# Altium PCB A3010_4MB.PcbDoc
Units mm, origin at the board's own origin, x right, y up, seen from the top; angles counter-clockwise.
Board outline 42.55 x 53.97 mm, 4 copper layers (F.Cu, In1.Cu, In2.Cu, B.Cu); 11 components, 73 nets, 178 pads, 69 vias.
Unrouted connection lines stored in the file: 1.
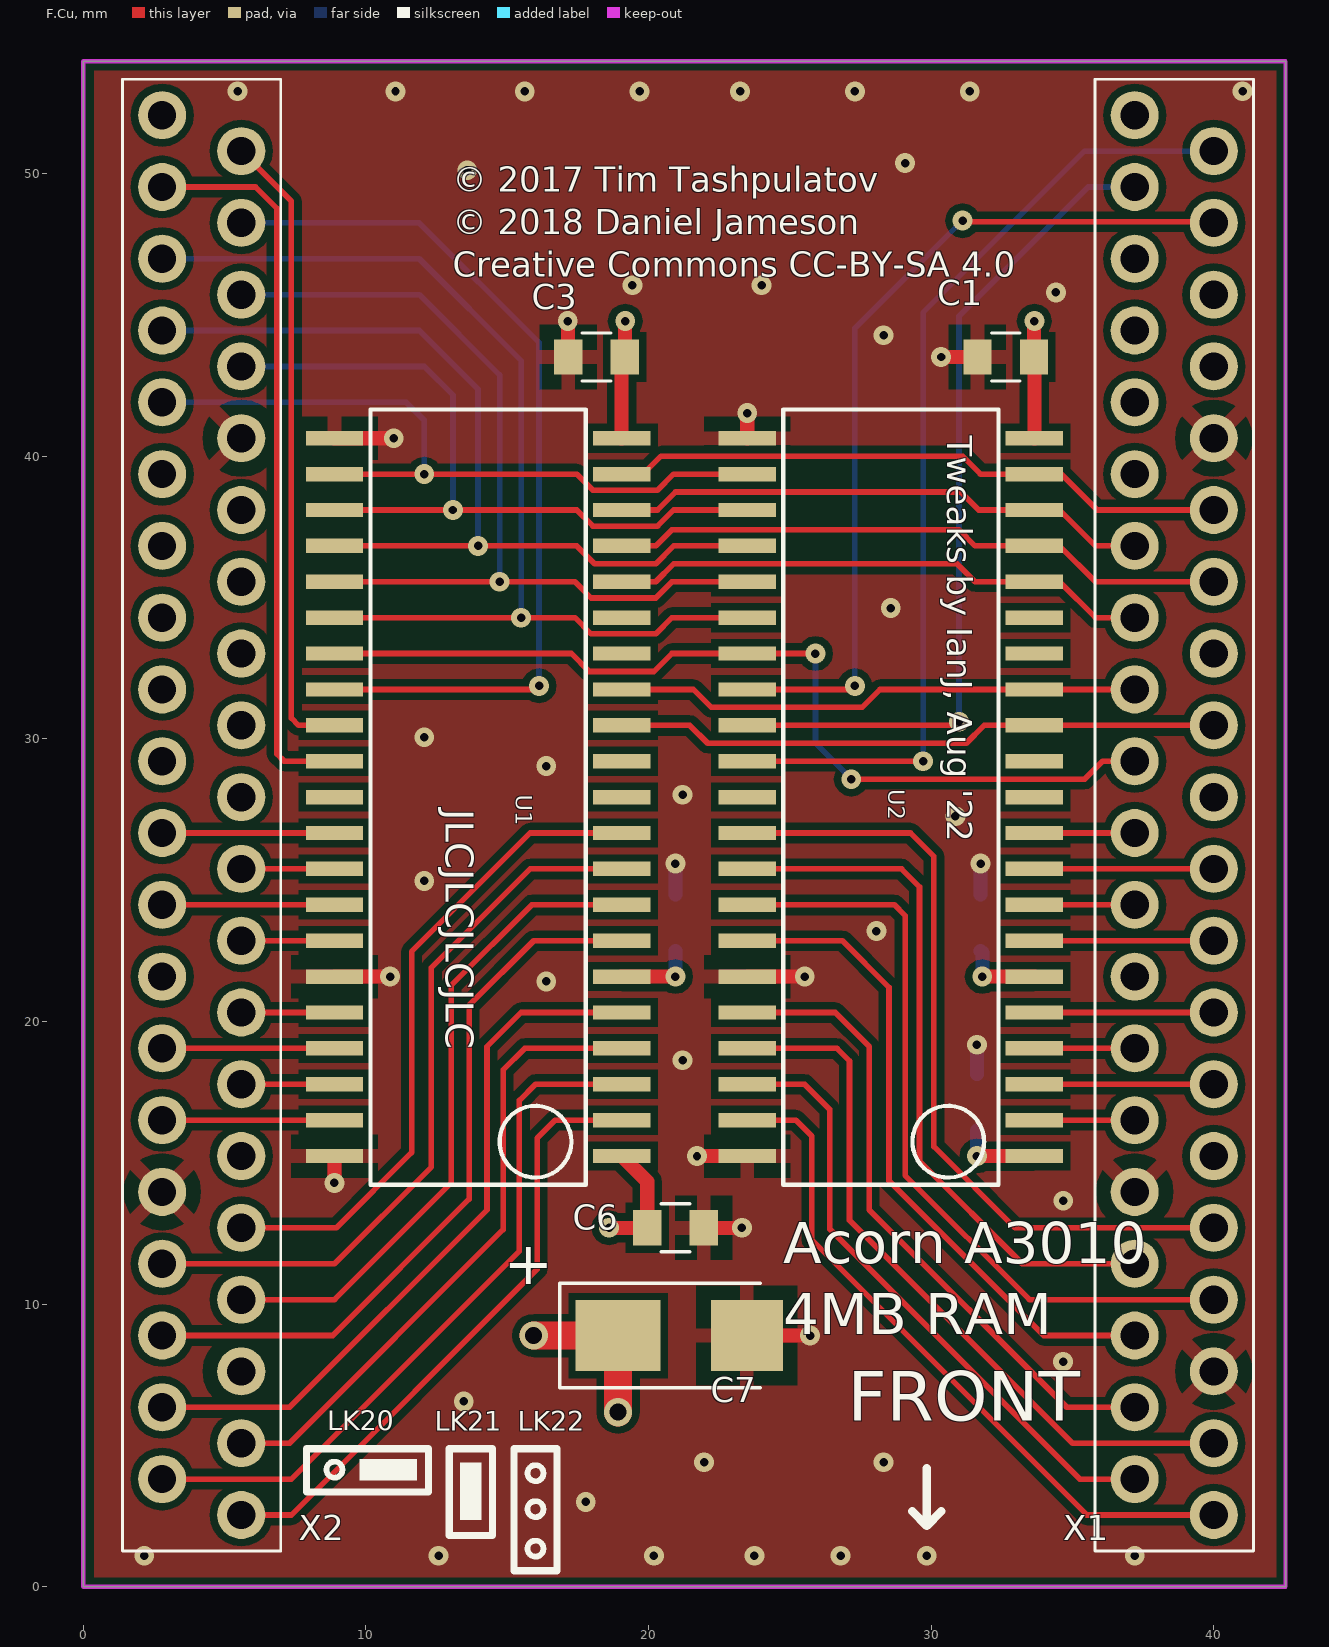
[diagram p0: F.Cu view]
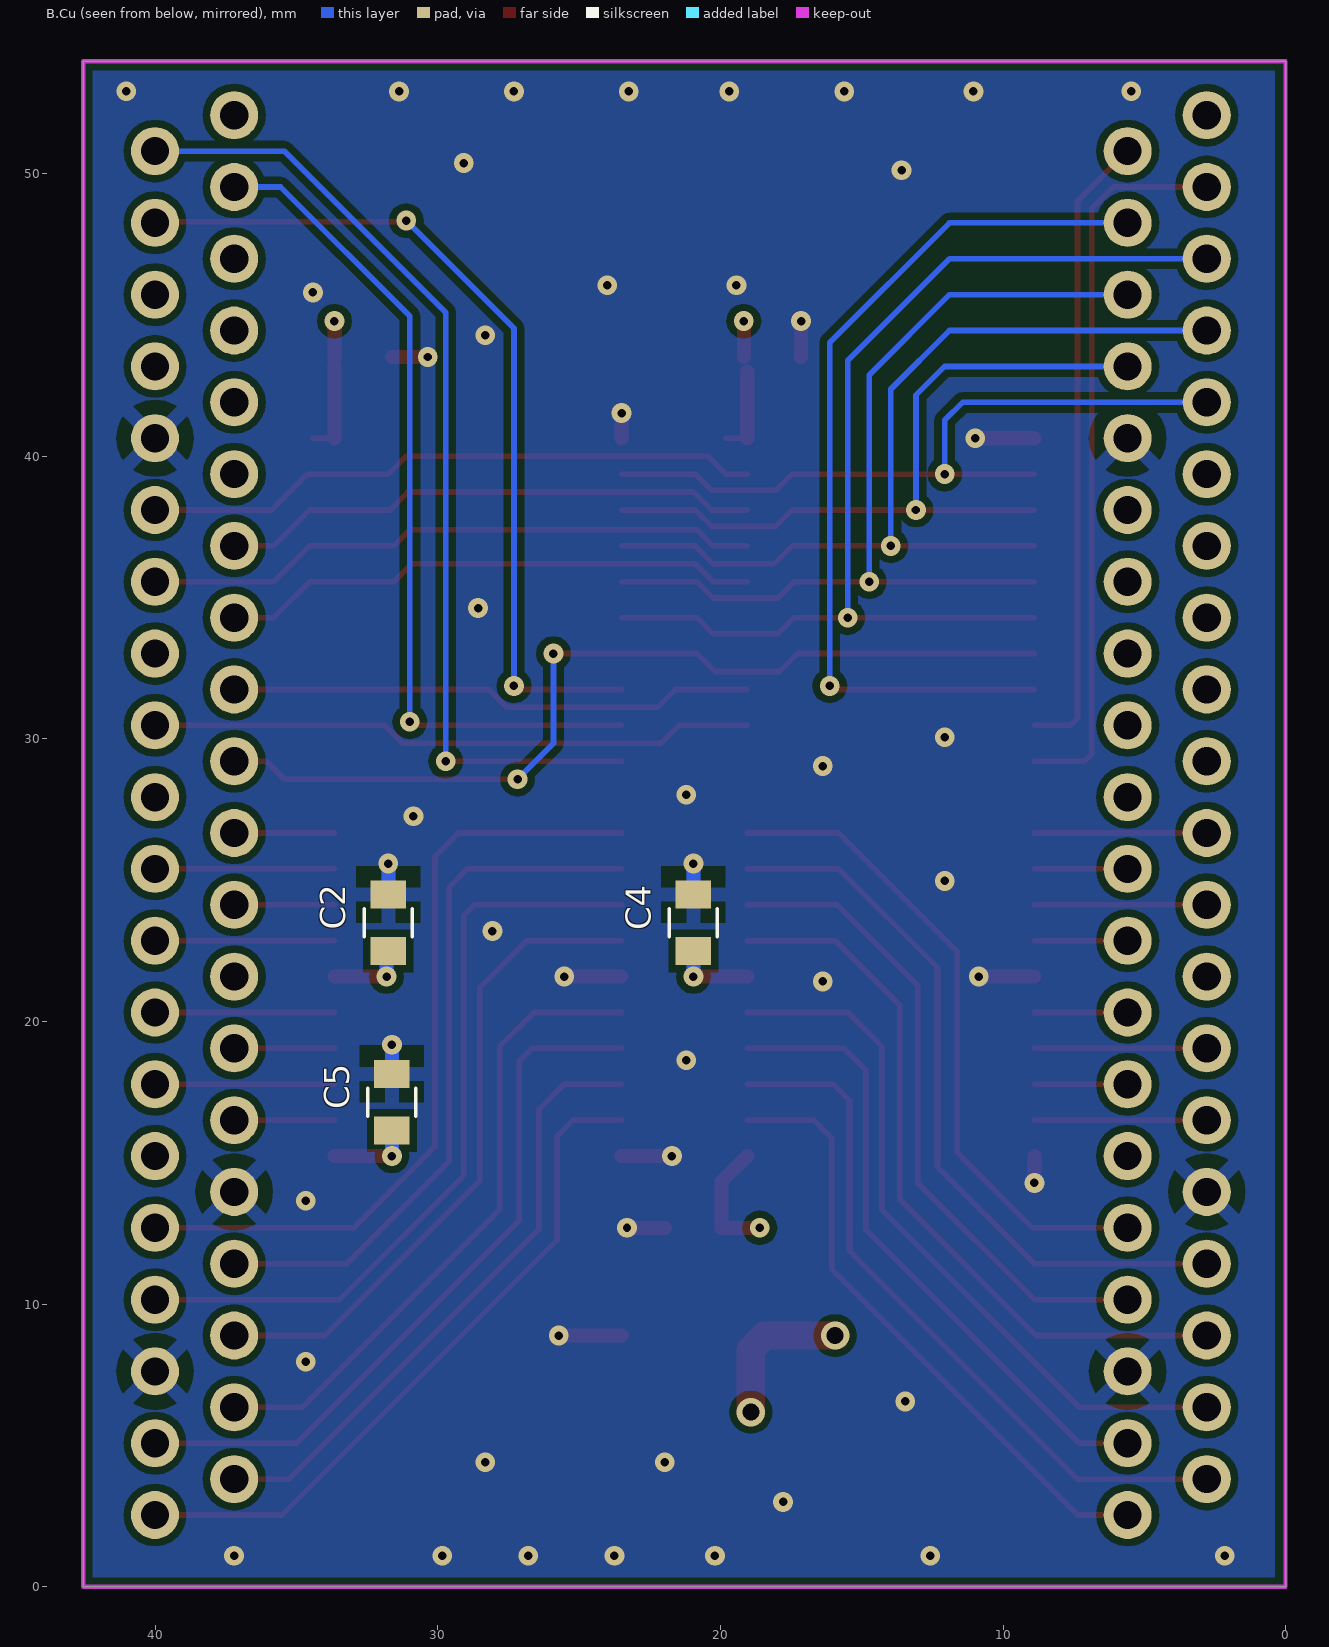
[diagram p1: B.Cu view, seen from below]
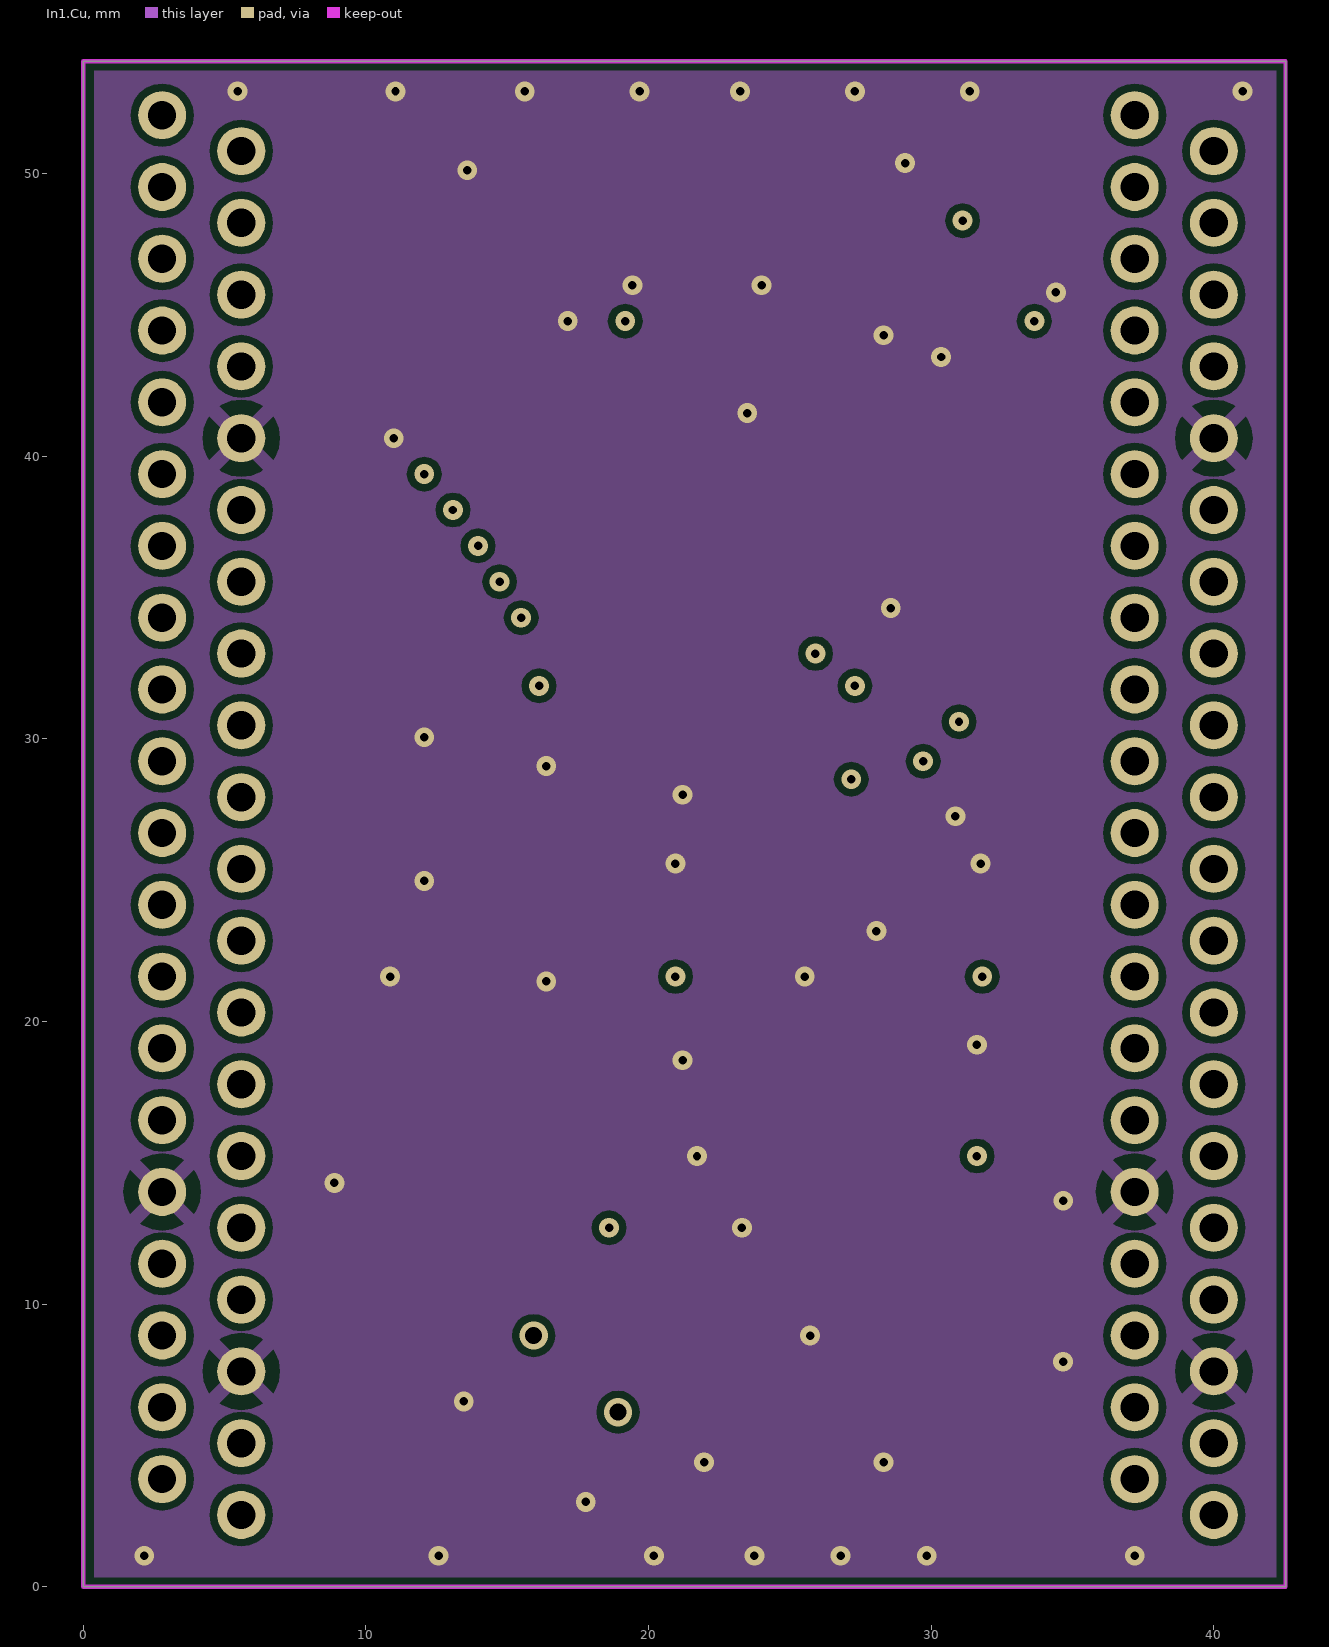
[diagram p2: In1.Cu]
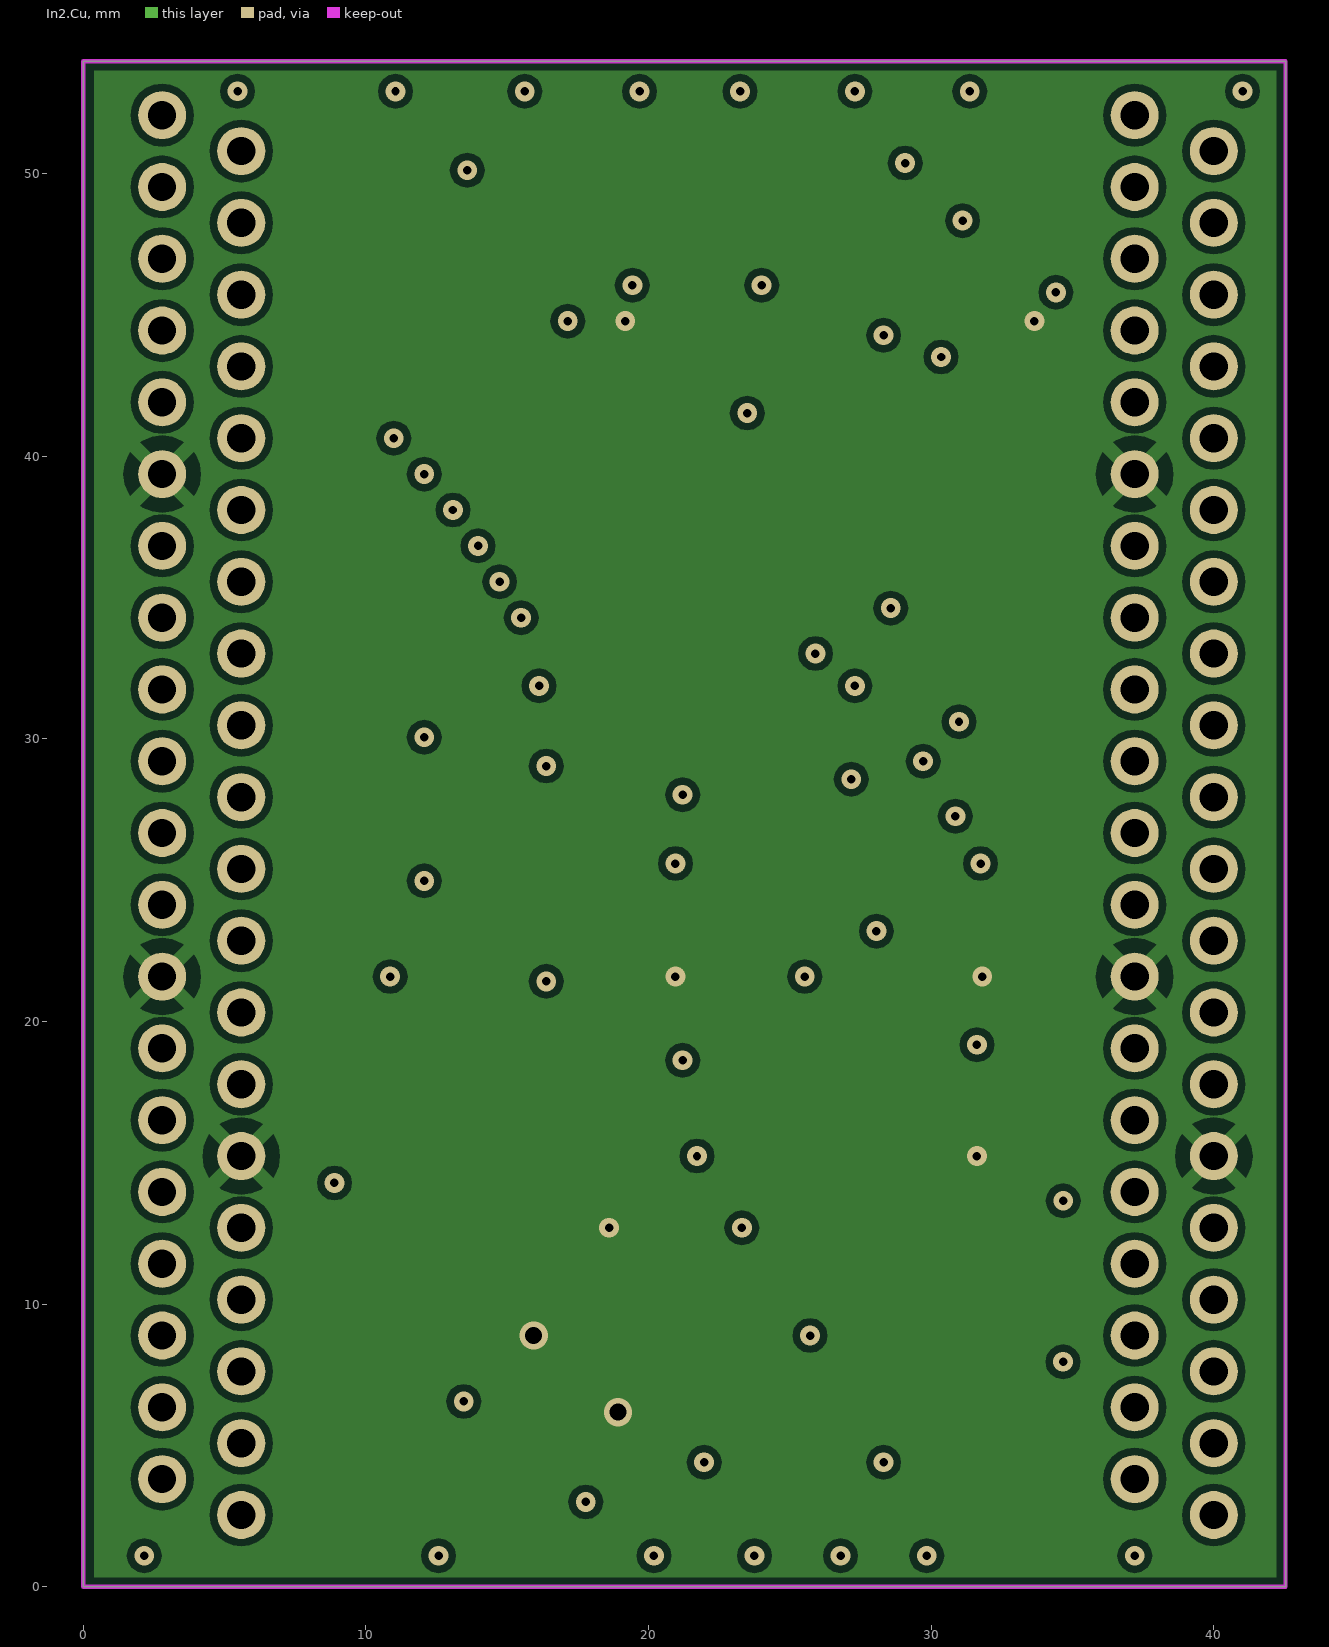
[diagram p3: In2.Cu]

## Layer stack, top to bottom
F.Mask: solder mask 0.0102, Solder Resist, Dk 3.5
F.Cu: signal copper 0.0356
Dielectric 1: dielectric 0.32, FR-4, Dk 4.8
In1.Cu: signal copper 0.0356
Dielectric2: dielectric 0.32, FR-4, Dk 4.8
In2.Cu: signal copper 0.0356
Dielectric3: dielectric 0.32, FR-4, Dk 4.8
B.Cu: signal copper 0.0356
B.Mask: solder mask 0.0102, Solder Resist, Dk 3.5

## Board outline
42.545,53.975 42.545,0 0,0 0,53.975

## Design rules (kind name [scope] priority, off if disabled: settings)
Clearance "Clearence 0.254_Polygon" [InNamedPolygon('In1.Cu-VSS') OR InNamedPolygon('In2.Cu-VCC') OR InNamedPolygon('In2.Cu-VCC-1') OR InNamedPolygon('F.Cu-VSS') OR InNamedPolygon('B.Cu-VSS')] p1: gap=0.254 ignorepadtopadclearanceinfootprint=FALSE
HoleSize "Hole Size (Default)" [All] p1: absolutevalues=TRUE maxlimit=10 minlimit=0.3 maxpercent=80.000 minpercent=20.000
MinimumSolderMaskSliver [All] p1: minsoldermaskwidth=0
PolygonConnect Polygon_B.Cu-VSS_ConnectDirect [IsNamedPolygon('B.Cu-VSS') vs IsVia] p1: connectstyle=Direct reliefconductorwidth=0.254 reliefentries=4 polygonreliefangle="90 Angle" airgapwidth=0.254
PolygonConnect Polygon_B.Cu-VSS_ConnectRelief45 [IsNamedPolygon('B.Cu-VSS') vs (IsThruPin or IsSMTPin) and (PadShape_AllLayers = 'Round')] p2: connectstyle=Relief reliefconductorwidth=0.508 reliefentries=4 polygonreliefangle="45 Angle" airgapwidth=0.508
PolygonConnect Polygon_B.Cu-VSS_ConnectRelief90 [IsNamedPolygon('B.Cu-VSS') vs (IsThruPin or IsSMTPin) and (PadShape_AllLayers <> 'Round')] p3: connectstyle=Relief reliefconductorwidth=0.508 reliefentries=4 polygonreliefangle="90 Angle" airgapwidth=0.508
PolygonConnect Polygon_F.Cu-VSS_ConnectDirect [IsNamedPolygon('F.Cu-VSS') vs IsVia] p4: connectstyle=Direct reliefconductorwidth=0.254 reliefentries=4 polygonreliefangle="90 Angle" airgapwidth=0.254
PolygonConnect Polygon_F.Cu-VSS_ConnectRelief45 [IsNamedPolygon('F.Cu-VSS') vs (IsThruPin or IsSMTPin) and (PadShape_AllLayers = 'Round')] p5: connectstyle=Relief reliefconductorwidth=0.508 reliefentries=4 polygonreliefangle="45 Angle" airgapwidth=0.508
PolygonConnect Polygon_F.Cu-VSS_ConnectRelief90 [IsNamedPolygon('F.Cu-VSS') vs (IsThruPin or IsSMTPin) and (PadShape_AllLayers <> 'Round')] p6: connectstyle=Relief reliefconductorwidth=0.508 reliefentries=4 polygonreliefangle="90 Angle" airgapwidth=0.508
PolygonConnect Polygon_In2.Cu-VCC-1_ConnectDirect [IsNamedPolygon('In2.Cu-VCC-1') vs IsVia] p7: connectstyle=Direct reliefconductorwidth=0.254 reliefentries=4 polygonreliefangle="90 Angle" airgapwidth=0.254
PolygonConnect Polygon_In2.Cu-VCC-1_ConnectRelief45 [IsNamedPolygon('In2.Cu-VCC-1') vs (IsThruPin or IsSMTPin) and (PadShape_AllLayers = 'Round')] p8: connectstyle=Relief reliefconductorwidth=0.508 reliefentries=4 polygonreliefangle="45 Angle" airgapwidth=0.508
PolygonConnect Polygon_In2.Cu-VCC-1_ConnectRelief90 [IsNamedPolygon('In2.Cu-VCC-1') vs (IsThruPin or IsSMTPin) and (PadShape_AllLayers <> 'Round')] p9: connectstyle=Relief reliefconductorwidth=0.508 reliefentries=4 polygonreliefangle="90 Angle" airgapwidth=0.508
PolygonConnect Polygon_In2.Cu-VCC_ConnectDirect [IsNamedPolygon('In2.Cu-VCC') vs IsVia] p10: connectstyle=Direct reliefconductorwidth=0.254 reliefentries=4 polygonreliefangle="90 Angle" airgapwidth=0.254
PolygonConnect Polygon_In2.Cu-VCC_ConnectRelief45 [IsNamedPolygon('In2.Cu-VCC') vs (IsThruPin or IsSMTPin) and (PadShape_AllLayers = 'Round')] p11: connectstyle=Relief reliefconductorwidth=0.508 reliefentries=4 polygonreliefangle="45 Angle" airgapwidth=0.508
PolygonConnect Polygon_In2.Cu-VCC_ConnectRelief90 [IsNamedPolygon('In2.Cu-VCC') vs (IsThruPin or IsSMTPin) and (PadShape_AllLayers <> 'Round')] p12: connectstyle=Relief reliefconductorwidth=0.508 reliefentries=4 polygonreliefangle="90 Angle" airgapwidth=0.508
PolygonConnect Polygon_In1.Cu-VSS_ConnectDirect [IsNamedPolygon('In1.Cu-VSS') vs IsVia] p13: connectstyle=Direct reliefconductorwidth=0.254 reliefentries=4 polygonreliefangle="90 Angle" airgapwidth=0.254
PolygonConnect Polygon_In1.Cu-VSS_ConnectRelief45 [IsNamedPolygon('In1.Cu-VSS') vs (IsThruPin or IsSMTPin) and (PadShape_AllLayers = 'Round')] p14: connectstyle=Relief reliefconductorwidth=0.508 reliefentries=4 polygonreliefangle="45 Angle" airgapwidth=0.508
PolygonConnect Polygon_In1.Cu-VSS_ConnectRelief90 [IsNamedPolygon('In1.Cu-VSS') vs (IsThruPin or IsSMTPin) and (PadShape_AllLayers <> 'Round')] p15: connectstyle=Relief reliefconductorwidth=0.508 reliefentries=4 polygonreliefangle="90 Angle" airgapwidth=0.508
RoutingVias [All] p1: holewidth=0.711 width=1.27 viastyle="Through Hole" minholewidth=0.711 minwidth=1.27 maxholewidth=0.711 maxwidth=1.27
SilkToSilkClearance [All] p1: silktosilkclearance=0
SilkToSolderMaskClearance [IsPad] p1: minsilkscreentomaskgap=0 clearancetoexposedcopper=TRUE
SolderMaskExpansion [All] p1: expansion=0.102 istentingtop=FALSE
Width [All] p1: maxlimit=10 minlimit=0.2 preferedwidth=0.25 minimp=50.000000 maximp=50.000000 favimp=50.000000
26 further rules are at their usual default settings.

## Classes and differential pairs
net class Default: A0 A1 A2 A3 A4 A5 A6 A7 A8 A9 C\A\S\0\ C\A\S\1\ C\A\S\2\ C\A\S\3\ D0 D1 D2 D3 D4 D5 D6 D7 D8 D9 D10 D11 D12 D13 D14 D15 D16 D17 D18 D19 D20 D21 D22 D23 D24 D25 D26 D27 D28 D29 D30 D31 Net-(U1-Pad15) Net-(U1-Pad16) Net-(U2-Pad15) Net-(U2-Pad16) Net-(X1-Pad21) Net-(X1-Pad25) Net-(X1-Pad32) Net-(X1-Pad33) Net-(X1-Pad34) Net-(X1-Pad35) Net-(X1-Pad36) Net-(X1-Pad40) Net-(X2-Pad21) Net-(X2-Pad22) Net-(X2-Pad23) Net-(X2-Pad24) Net-(X2-Pad25) Net-(X2-Pad26) Net-(X2-Pad27) Net-(X2-Pad28) Net-(X2-Pad29) Net-(X2-Pad40) O\E\ R\A\S\ VCC VSS W\E\

## Components (designator, comment, footprint, x,y, rotation, side; value= is the part's Value field where it differs from the comment)
C1 "2,2u" C_0805#1 32.639,43.51 r180 top
C2 "2,2u" C_0805#2 31.75,23.491 r270 bottom
C3 "2,2u" C_0805#1 18.161,43.51 r180 top
C4 "2,2u" C_0805#2 20.955,23.491 r270 bottom
C5 "2,2u" C_0805#2 31.623,17.141 r270 bottom
C6 "2,2u" C_0805#1 20.955,12.696 r0 top
C7 "47u 16V" CP_Tantalum_Case-C_EIA-6032-28_Reflow 20.955,8.886 r0 top
U1 "IS41C16105C" SOJ-42 13.97,27.936 r90 top locked
U2 "IS41C16105C" SOJ-42 28.575,27.936 r90 top locked
X1 "ZIP40" ZIP40-P-475-1.27 38.605,26.666 r180 top locked
X2 "ZIP40" ZIP40-P-475-1.27 4.191,26.666 r180 top locked

## Footprints (in the part's own frame and the unit in brackets; to place one, negate y for a bottom-side part, rotate by r counter-clockwise, add the part's x,y. Pads: shape width x height; smd on the part's side, far side on the other; paste and mask are expansions set on the pad)
C_0805#1 [mm]
  rect 1x1.25 smd mask+0.2: 1(-1,0) 2(1,0)
  silkscreen extent -0.5,-0.85 0.5,0.85
C_0805#2 [mm]
  rect 1x1.25 smd mask+0.2: 1(1,0) 2(-1,0)
  silkscreen extent -0.5,-0.85 0.5,0.85
CP_Tantalum_Case-C_EIA-6032-28_Reflow [mm]
  rect 3x2.5 smd mask+0.2: 1(-2.03,0)
  rect 2.55x2.5 smd mask+0.2: 2(2.525,0)
  silkscreen extent -4.1,-1.85 3,1.85
SOJ-42 [mil]
  rect 20x80 smd mask+7.87: 1(-500,-200) 2(-450,-200) 3(-400,-200) 4(-350,-200) 5(-300,-200) 6(-250,-200) 7(-200,-200) 8(-150,-200) 9(-100,-200) 10(-50,-200) 11(0,-200) 12(50,-200) 13(100,-200) 14(150,-200) 15(200,-200) 16(250,-200) 17(300,-200) 18(350,-200) 19(400,-200) 20(450,-200) 21(500,-200) 22(500,200) 23(450,200) 24(400,200) 25(350,200) 26(300,200) 27(250,200) 28(200,200) 29(150,200) 30(100,200) 31(50,200) 32(0,200) 33(-50,200) 34(-100,200) 35(-150,200) 36(-200,200) 37(-250,200) 38(-300,200) 39(-350,200) 40(-400,200) 41(-450,200) 42(-500,200)
  silkscreen extent -540,-150 540,150
ZIP40-P-475-1.27 [mm]
  round 1.7 hole 1 paste-1.7 mask+0.2: 1(-1.4,24.13) 2(1.4,22.86) 3(-1.4,21.59) 4(1.4,20.32) 5(-1.4,19.05) 6(1.4,17.78) 7(-1.4,16.51) 8(1.4,15.24) 9(-1.4,13.97) 10(1.4,12.7) 11(-1.4,11.43) 12(1.4,10.16) 13(-1.4,8.89) 14(1.4,7.62) 15(-1.4,6.35) 16(1.4,5.08) 17(-1.4,3.81) 18(1.4,2.54) 19(-1.4,1.27) 20(1.4,0) 21(-1.4,-1.27) 22(1.4,-2.54) 23(-1.4,-3.81) 24(1.4,-5.08) 25(-1.4,-6.35) 26(1.4,-7.62) 27(-1.4,-8.89) 28(1.4,-10.16) 29(-1.4,-11.43) 30(1.4,-12.7) 31(-1.4,-13.97) 32(1.4,-15.24) 33(-1.4,-16.51) 34(1.4,-17.78) 35(-1.4,-19.05) 36(1.4,-20.32) 37(-1.4,-21.59) 38(1.4,-22.86) 39(-1.4,-24.13) 40(1.4,-25.4)
  silkscreen extent -2.8,-26.67 2.8,25.4

## Part data
C1 C2 C3 C4 C5 C6: library part C
C7: library part CP1
U1 U2: library part DRAM_1MX16_SOJ

## Via types
v1: diameter 0.7, hole 0.3, F.Cu to B.Cu, tented both sides, 67 vias
v2: diameter 1, hole 0.6, F.Cu to B.Cu, tented both sides, 2 vias

## Nets (pads, with @x,y where several pads share a name; then routed paths per layer and width w, separated by ;. In a path a pad name is that pad's centre, name@x,y a point inside that pad or via, vN(x,y) a via of type N, cw(c..) or ccw(c..) an arc to the next point about the centre after c; other vN are vias at no path point)
A0: U1.17 U2.17 X1.26 | length 19.2
  F.Cu w0.2: U1.17 20.256,35.556 20.892,36.191 30.924,36.191 31.559,35.556 U2.17 34.544,35.556 35.814,34.286 X1.26
A1: U1.18 U2.18 X1.27 | length 22
  F.Cu w0.2: U1.18 20.256,36.826 20.828,37.398 30.988,37.398 31.559,36.826 U2.18 34.544,36.826 35.814,35.556 X1.27
A2: U1.19 U2.19 X1.28 | length 19.2
  F.Cu w0.2: U1.19 20.32,38.096 20.955,38.731 31.051,38.731 31.686,38.096 U2.19 34.544,38.096 35.814,36.826 X1.28
A3: U1.20 U2.20 X1.29 | length 22
  F.Cu w0.2: U1.20 19.812,39.366 20.447,40.001 31.115,40.001 31.75,39.366 U2.20 34.608,39.366 35.877,38.096 X1.29
A4: U1.23 U2.23 X2.32 | length 26.5
  F.Cu w0.2: U1.23 v1(12.065,39.366) 17.462,39.366 18.034,38.795 20.32,38.795 20.892,39.366 U2.23
  B.Cu w0.2: X2.32 11.43,41.906 12.065,41.271 v1(12.065,39.366)
A5: U1.24 U2.24 X2.33 | length 27.1
  F.Cu w0.2: U1.24 v1(13.081,38.096) 17.462,38.096 18.034,37.525 20.32,37.525 20.892,38.096 U2.24
  B.Cu w0.2: X2.33 12.065,43.176 13.081,42.16 v1(13.081,38.096)
A6: U1.25 U2.25 X2.34 | length 32.7
  F.Cu w0.2: U1.25 v1(13.97,36.826) 17.462,36.826 18.098,36.191 20.256,36.191 20.892,36.826 U2.25
  B.Cu w0.2: X2.34 11.891,44.446 13.97,42.367 v1(13.97,36.826)
A7: U1.26 U2.26 X2.35 | length 32.7
  F.Cu w0.2: U1.26 v1(14.732,35.556) 17.399,35.556 17.97,34.985 20.256,34.985 20.828,35.556 U2.26
  B.Cu w0.2: X2.35 11.891,45.716 14.732,42.875 v1(14.732,35.556)
A8: U1.27 U2.27 X2.36 | length 38.4
  F.Cu w0.2: U1.27 v1(15.494,34.286) 17.399,34.286 17.97,33.715 20.256,33.715 20.828,34.286 U2.27
  B.Cu w0.2: X2.36 11.891,46.986 15.494,43.383 v1(15.494,34.286)
A9: U1.28 U2.28 X1.22 | length 32.8
  F.Cu w0.2: U1.28 17.272,33.016 17.907,32.381 20.193,32.381 20.828,33.016 U2.28 v1(25.908,33.016) ; v1(27.178,28.571) 35.433,28.571 36.068,29.206 X1.22
  B.Cu w0.2: v1(25.908,33.016) 25.908,29.841 v1(27.178,28.571)
C\A\S\0\: U2.31 X1.39 | length 34.8
  F.Cu w0.2: U2.31 v1(29.718,29.206)
  B.Cu w0.2: v1(29.718,29.206) 29.718,45.081 35.433,50.796 X1.39
C\A\S\1\: U2.30 X1.38 | length 30
  F.Cu w0.2: U2.30 30.861,30.476 v1(30.988,30.603)
  B.Cu w0.2: v1(30.988,30.603) 30.988,44.954 35.56,49.526 X1.38
C\A\S\2\: U1.30 X2.39 | length 22.4
  F.Cu w0.2: X2.39 7.366,49.021 7.366,30.73 7.62,30.476 U1.30
C\A\S\3\: U1.31 X2.38 | length 25.8
  F.Cu w0.2: X2.38 6.096,49.526 6.858,48.764 6.858,29.46 7.112,29.206 U1.31
D0: U2.2 X1.12 | length 3.6
  F.Cu w0.2: U2.2 X1.12
D1: U2.3 X1.13 | length 6.3
  F.Cu w0.2: U2.3 X1.13
D2: U2.4 X1.14 | length 3.6
  F.Cu w0.2: U2.4 X1.14
D3: U2.5 X1.15 | length 6.3
  F.Cu w0.2: U2.5 X1.15
D4: U2.7 X1.17 | length 6.3
  F.Cu w0.2: U2.7 X1.17
D5: U2.8 X1.18 | length 3.6
  F.Cu w0.2: U2.8 X1.18
D6: U2.9 X1.19 | length 6.3
  F.Cu w0.2: U2.9 X1.19
D7: U2.10 X1.20 | length 3.6
  F.Cu w0.2: U2.10 X1.20
D8: U2.41 X1.1 | length 24.4
  F.Cu w0.2: U2.41 25.209,16.506 25.781,15.935 25.781,12.268 35.513,2.536 X1.1
D9: U2.40 X1.2 | length 22
  F.Cu w0.2: U2.40 25.527,17.776 26.416,16.887 26.416,12.649 35.259,3.806 X1.2
D10: U2.39 X1.3 | length 25.6
  F.Cu w0.2: U2.39 26.67,19.046 27.114,18.602 27.114,12.967 35.005,5.076 X1.3
D11: U2.38 X1.4 | length 22.9
  F.Cu w0.2: U2.38 26.607,20.316 27.813,19.11 27.813,13.331 34.798,6.346 X1.4
D12: U2.36 X1.6 | length 23.5
  F.Cu w0.2: U2.36 26.86,22.856 28.511,21.205 28.511,14.364 33.989,8.886 X1.6
D13: U2.35 X1.7 | length 27.7
  F.Cu w0.2: U2.35 28.702,24.126 29.083,23.745 29.083,14.554 33.481,10.156 X1.7
D14: U2.34 X1.8 | length 25.2
  F.Cu w0.2: U2.34 28.956,25.396 29.591,24.761 29.591,15.062 33.227,11.426 X1.8
D15: U2.33 X1.9 | length 28.3
  F.Cu w0.2: U2.33 29.273,26.666 30.099,25.841 30.099,15.57 32.973,12.696 X1.9
D16: U1.41 X2.12 | length 6.1
  F.Cu w0.2: X2.12 U1.41
D17: U1.40 X2.13 | length 3.3
  F.Cu w0.2: X2.13 U1.40
D18: U1.39 X2.14 | length 6.1
  F.Cu w0.2: X2.14 U1.39
D19: U1.38 X2.15 | length 3.3
  F.Cu w0.2: X2.15 U1.38
D20: U1.36 X2.17 | length 3.3
  F.Cu w0.2: X2.17 U1.36
D21: U1.35 X2.18 | length 6.1
  F.Cu w0.2: X2.18 U1.35
D22: U1.34 X2.19 | length 3.3
  F.Cu w0.2: X2.19 U1.34
D23: U1.33 X2.20 | length 6.1
  F.Cu w0.2: X2.20 U1.33
D24: U1.2 X2.1 | length 22
  F.Cu w0.2: X2.1 7.366,2.536 16.066,11.236 16.066,15.871 16.7,16.506 U1.2
D25: U1.3 X2.2 | length 25.2
  F.Cu w0.2: X2.2 7.366,3.806 15.43,11.871 15.43,17.205 16.002,17.776 U1.3
D26: U1.4 X2.3 | length 22.6
  F.Cu w0.2: X2.3 7.302,5.076 14.859,12.633 14.859,18.284 15.621,19.046 U1.4
D27: U1.5 X2.4 | length 25.4
  F.Cu w0.2: X2.4 7.302,6.346 14.287,13.331 14.287,19.11 15.494,20.316 U1.5
D28: U1.7 X2.6 | length 26.1
  F.Cu w0.2: X2.6 8.826,8.886 13.652,13.712 13.652,20.57 15.938,22.856 U1.7
D29: U1.8 X2.7 | length 23.3
  F.Cu w0.2: X2.7 8.89,10.156 13.018,14.284 13.018,21.269 15.875,24.126 U1.8
D30: U1.9 X2.8 | length 26.2
  F.Cu w0.2: X2.8 8.89,11.426 12.319,14.855 12.319,21.904 15.811,25.396 U1.9
D31: U1.10 X2.9 | length 23.4
  F.Cu w0.2: X2.9 8.954,12.696 11.62,15.363 11.62,22.475 15.811,26.666 U1.10
Net-(U1-Pad15): U1.15
Net-(U1-Pad16): U1.16
Net-(U2-Pad15): U2.15
Net-(U2-Pad16): U2.16
Net-(X1-Pad21): X1.21
Net-(X1-Pad25): X1.25
Net-(X1-Pad32): X1.32
Net-(X1-Pad33): X1.33
Net-(X1-Pad34): X1.34
Net-(X1-Pad35): X1.35
Net-(X1-Pad36): X1.36
Net-(X1-Pad40): X1.40
Net-(X2-Pad21): X2.21
Net-(X2-Pad22): X2.22
Net-(X2-Pad23): X2.23
Net-(X2-Pad24): X2.24
Net-(X2-Pad25): X2.25
Net-(X2-Pad26): X2.26
Net-(X2-Pad27): X2.27
Net-(X2-Pad28): X2.28
Net-(X2-Pad29): X2.29
Net-(X2-Pad40): X2.40
O\E\: U1.29 U2.29 X1.37 X2.37 | length 62.6
  F.Cu w0.2: U1.29 16.002,31.746 v1(16.129,31.873) ; U2.29 27.178,31.746 v1(27.305,31.873) ; v1(31.115,48.336) 31.155,48.296 39.965,48.296 X1.37
  B.Cu w0.2: X2.37 11.891,48.256 16.129,44.018 v1(16.129,31.873) ; v1(27.305,31.873) 27.305,44.526 v1(31.115,48.336)
R\A\S\: U1.14 U2.14 X1.24 | length 18.7
  F.Cu w0.2: U1.14 21.59,31.746 22.225,31.111 27.559,31.111 28.194,31.746 U2.14 X1.24
VCC: C1.1 C2.1 C3.1 C4.1 C5.1 C6.1 C7.1 U1.1 U1.6 U1.21 U2.1 U2.6 U2.21 X1.11 X1.16 X1.30 X2.11 X2.16 X2.30 | length 28.1
  F.Cu w0.2: U1.21 U1.21@19.812,40.636 ; U2.1@32.766,15.236 U2.1 ; U2.21 U2.21@34.417,40.636
  F.Cu w0.5: v1(18.605,12.696) C6.1 19.955,14.331 U1.1 ; U1.6 v1(20.955,21.586) ; U1.21 C3.1@19.05,42.988 ; C3.1 19.169,43.518 19.169,44.772 v1(19.177,44.78) ; v1(31.623,15.236) U2.1 ; v1(31.813,21.586) U2.6 ; C1.1 33.647,43.518 33.647,44.772 v1(33.655,44.78) ; U2.21 C1.1@33.655,43.24
  F.Cu w1: v2(15.938,8.886) 18.43,8.886 18.923,8.393 v2(18.923,6.172)
  B.Cu w0.5: v1(20.955,21.586) C4.1 ; v1(31.623,15.236) C5.1 ; C2.1 31.813,22.428 v1(31.813,21.586)
VSS: C1.2 C2.2 C3.2 C4.2 C5.2 C6.2 C7.2 U1.22 U1.37 U1.42 U2.22 U2.37 U2.42 X1.5 X1.10 X1.31 X2.5 X2.10 X2.31 | length 19.1
  F.Cu w0.5: v1(8.89,14.284) U1.42 ; U1.37 v1(10.858,21.586) ; U1.22 v1(10.986,40.636) ; v1(17.145,44.78) 17.153,44.772 17.153,43.518 C3.2 ; v1(21.717,15.236) U2.42 ; C6.2 v1(23.304,12.696) ; C7.2 v1(25.717,8.886) ; U2.37 v1(25.527,21.586) ; U2.22 v1(23.495,41.525) ; v1(30.353,43.51) C1.2@31.623,43.51
  B.Cu w0.5: C4.2 v1(20.955,25.587) ; C5.2 v1(31.623,19.173) ; C2.2 v1(31.75,25.587)
  other v1: 2.158,1.097 12.573,1.092 20.193,1.092 23.749,1.092 26.797,1.092 29.845,1.092 37.21,1.097 17.78,2.997 21.97,4.399 28.32,4.399 13.462,6.553 34.67,7.955 34.673,13.652 21.208,18.623 16.382,21.417 28.066,23.195 12.064,24.973 30.86,27.259 21.208,28.021 16.382,29.037 12.064,30.053 28.574,34.625 28.32,44.277 34.417,45.796 19.431,46.05 24.003,46.05 13.588,50.119 29.082,50.373 5.46,52.913 11.049,52.908 15.621,52.908 19.685,52.908 23.241,52.908 27.305,52.908 31.369,52.908 41.02,52.913
W\E\: U1.13 U2.13 X1.23 | length 21.5
  F.Cu w0.2: U1.13 21.463,30.476 22.098,29.841 31.242,29.841 31.877,30.476 U2.13 X1.23
pads on no net: U1.11 U1.12 U1.32 U2.11 U2.12 U2.32

## Polygon pours and split planes (outlines as drawn)
VSS on B.Cu "B.Cu-VSS" (solid, remove dead copper, pour order 4): 42.291,0.33 0.381,0.33 0.381,53.67 42.291,53.67
VSS on F.Cu "F.Cu-VSS" (solid, remove dead copper, pour order 3): 42.291,0.33 0.381,0.33 0.381,53.67 42.291,53.67
VCC on In2.Cu "In2.Cu-VCC" (solid, remove dead copper, pour order 1): 0.381,53.67 0.381,0.33 42.291,0.33 42.291,53.67
VSS on In1.Cu "In1.Cu-VSS" (solid, remove dead copper, pour order 0): 0.381,0.33 42.291,0.33 42.291,53.67 0.381,53.67

## Keep-outs
Edge.Cuts:
  lines w0.15: 0,-0.004 42.545,-0.004 ; 0,-0.004 0,53.971 ; 0,-0.004 42.545,-0.004 ; 0,-0.004 0,53.971 ; 0,53.971 42.545,53.971 ; 0,53.971 42.545,53.971 ; 42.545,-0.004 42.545,53.971 ; 42.545,-0.004 42.545,53.971

## Silkscreen, mask and mechanical layers (free items; w line width, h text height)
F.SilkS:
  circle w0.2: c8.89,4.14 r0.284
  circle w0.2: c16.002,4.013 r0.284
  circle w0.2: c16.002,2.743 r0.284
  circle w0.2: c16.002,1.346 r0.284
  region: 9.779,4.521 9.779,3.759 11.811,3.759 11.811,4.521
  region: 14.097,4.394 13.335,4.394 13.335,2.362 14.097,2.362
  lines w0.254: 7.895,3.353 7.895,4.877 12.213,4.877 12.213,3.353 7.895,3.353 ; 12.954,1.812 14.478,1.812 14.478,4.881 12.954,4.881 12.954,1.812 ; 15.24,0.563 16.764,0.563 16.764,4.881 15.24,4.881 15.24,0.563
  lines w0.3: 29.337,2.663 29.845,2.155 ; 29.845,4.187 29.845,2.155 ; 30.353,2.663 29.845,2.155
  text "© 2017 Tim Tashpulatov / © 2018 Daniel Jameson / Creative Commons CC-BY-SA 4.0" at 13.081,46.05 h1.5
  text "Tweaks by IanJ, Aug '22" at 30.277,40.716 h1.5 r270
  text "JLCJLCJLCJLC" at 12.827,27.508 h1 r270
  text "+" at 16.637,12.014 h1.52 r180
  text "Acorn A3010 / 4MB RAM" at 24.765,8.458 h2.5
  text "LK20" at 8.636,5.296 h1.2
  text "LK21" at 12.446,5.283 h1.2
  text "LK22" at 15.367,5.283 h1.2
  text "FRONT" at 27.051,5.283 h3

## Dimensions
0,53.971 to 0,-0.004 on Cmts.User
0,53.971 to 42.545,53.971 on Cmts.User
2.54,55.876 to 40.005,55.876 on Cmts.User
5.715,66.626 to 40.005,66.626 on Cmts.User